# Altium PCB disp.PcbDoc
Units mm, origin at the board's own origin, x right, y up, seen from the top; angles counter-clockwise.
Board outline 82.63 x 32 mm, 2 copper layers (Top Layer, Bottom Layer); 16 components, 16 nets, 79 pads, 3 vias.
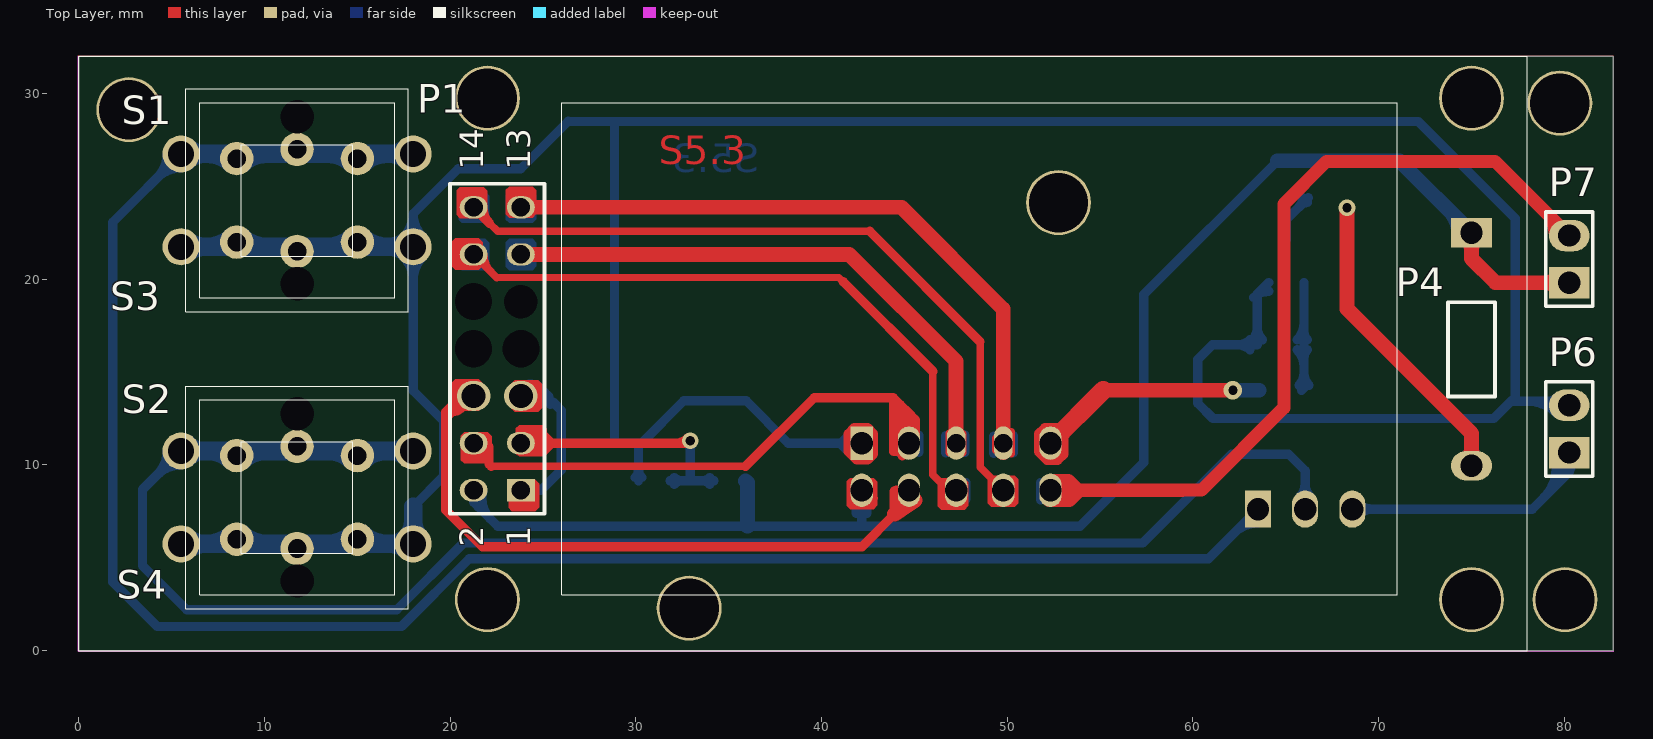
[diagram p0: Top Layer view]
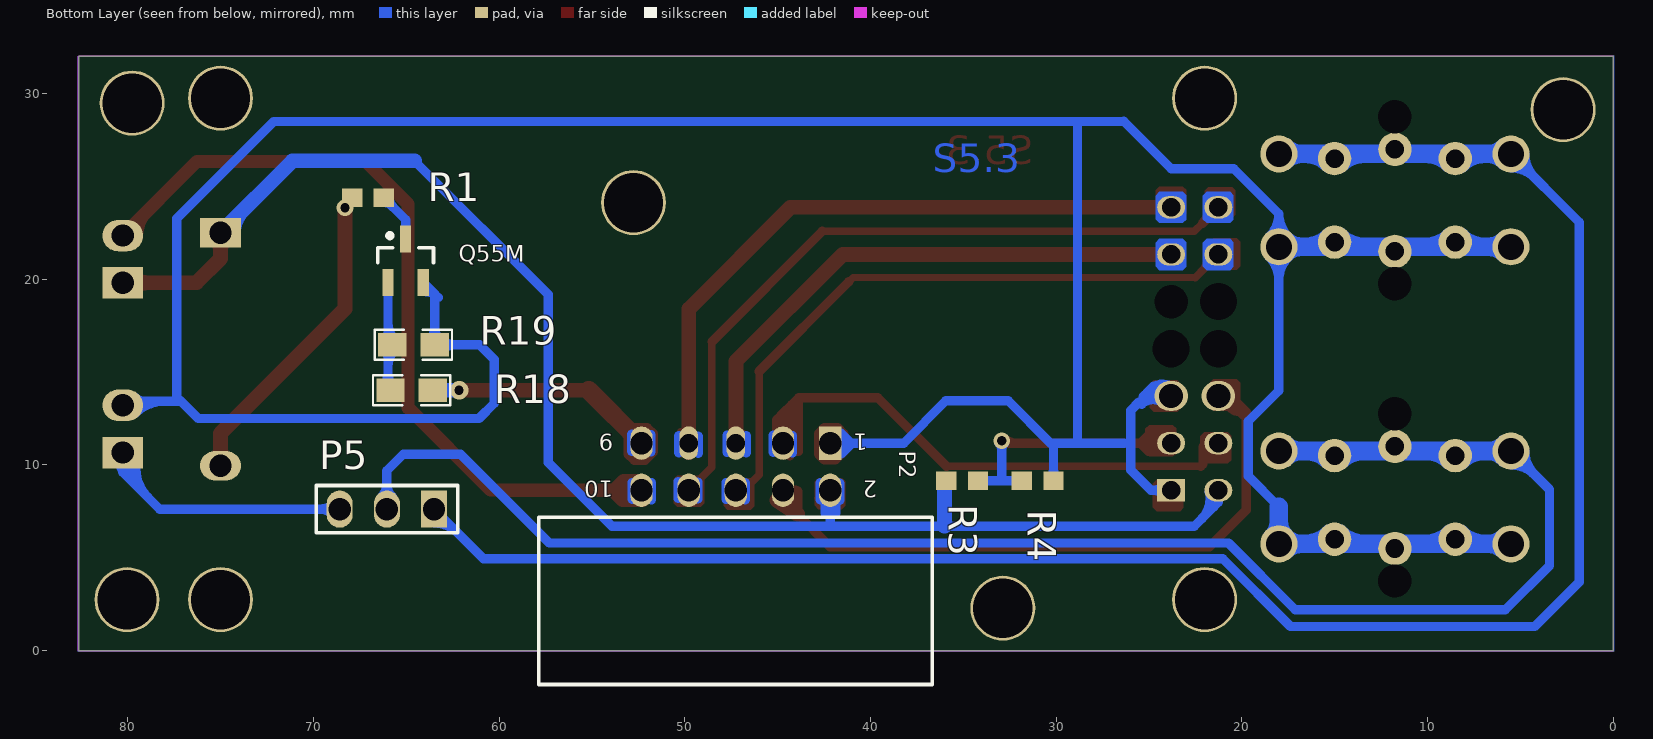
[diagram p1: Bottom Layer view, seen from below]

## Layer stack, top to bottom
Top Layer: signal copper 0.0356
Dielectric: dielectric 0.32, FR-4, Dk 4.8
Bottom Layer: signal copper 0.0356

## Board outline
0,0 82.625,0 82.625,32 0,32

## Design rules (kind name [scope] priority, off if disabled: settings)
Clearance [All] p1: gap=0.2
PolygonConnect [All] p1: connectstyle=Relief reliefconductorwidth=0.254 reliefentries=4 polygonreliefangle="90 Angle"
RoomDefinition Sheet1 [InComponentClass('Sheet1')] p1: confinementstyle=ConfineIn formatcopy=TRUE lockcomponents=FALSE outline -75.6,-85.9 -24.8,-85.9 -24.8,-60.5 -75.6,-60.5
RoutingVias [All] p1: holewidth=1 width=1.27 viastyle="Through Hole" minholewidth=0.8 minwidth=1.27 maxholewidth=2 maxwidth=2
SilkscreenOverComponentPads [All] p1: minsilkscreentomaskgap=0.254
SolderMaskExpansion [All] p1: expansion=0.102
TestPointUsage [All] p1: valid=0 allowmultiple=FALSE
Testpoint [All] p1: side=15 testpointundercomponent=TRUE minsize=1.016 maxsize=2.54 preferedsize=1.524 minholesize=0 maxholesize=1.016 preferedholesize=0.813 testpointgrid=0.025 style=1023 order=0-112345678
Width [All] p1: maxlimit=2 minlimit=0.254 preferedwidth=0.8
23 further rules are at their usual default settings.

## Classes and differential pairs
component class Sheet1: P1 P2 P4 P5 P6 Q55M R1 R3 R4 R18 R19 S1 S2 S3 S4

## Components (designator, comment, footprint, x,y, rotation, side; value= is the part's Value field where it differs from the comment)
P1 "Header 7X2" HDR2X7 23.8,8.636 r90 top locked
P2 "Header 5X2" HDR2X5 42.164,11.176 r0 bottom (schematic designator P4)
P4 "Header 2" HDR1X2#1 75,17.5 r270 top
P5 "Header 3" HDR1X3 63.5,7.62 r0 bottom
P6 "Header 2" HDR1X2#2 80.264,10.668 r90 top
P7 "Header 2" HDR1X2#2 80.264,19.812 r90 top (schematic designator P6)
Q55M "Tr" NPN 65.024,20.828 r180 bottom
R1 "Res Semi" 1608[0603] 67.056,24.384 r0 bottom
R3 "Res Semi" 1608[0603] 35.052,9.144 r180 bottom
R4 "Res Semi" 1608[0603] 30.988,9.144 r180 bottom
R18 "Res" R0805 64.681,14.02 r180 bottom
R19 "Res" R0805 64.586,16.472 r180 bottom
S1 "SW-PB" "omron B3F" 11.75,24.25 r0 top locked
S2 "SW-PB" "omron B3F" 11.75,8.25 r0 top locked
S3 "SW-PB" "button 66" 11.75,24.25 r0 top locked
S4 "SW-PB" "button 66" 11.75,8.25 r0 top locked

## Footprints (in the part's own frame and the unit in brackets; to place one, negate y for a bottom-side part, rotate by r counter-clockwise, add the part's x,y. Pads: shape width x height; smd on the part's side, far side on the other; paste and mask are expansions set on the pad)
1608[0603] [mm] "Chip Capacitor; Body 1.6 x 0.8 mm (LxW typ)"
  rect 1.1x1 smd: 1(-0.85,0) 2(0.85,0)
"button 66" [mm] "Circuit Breaker; 2 Leads"
  round 1.8 hole 1: 1(-3.25,-2.25) 1(0,-2.75) 1(3.25,-2.25) 2(-3.25,2.25) 2(0,2.75) 2(3.25,2.25)
  silkscreen extent -3,-3 3,3
HDR1X2#1 [mm] "Connector; Header; 2 Position"
  rect 1.6x2.2 hole 1.2: 1(-5,0)
  oval 1.6x2.2 hole 1.2: 2(7.54,0)
  silkscreen extent -1.27,-1.27 3.81,1.27
HDR1X2#2 [mm] "Connector; Header; 2 Position"
  rect 1.7x2.2 hole 1.2: 1(0,0)
  oval 1.7x2.2 hole 1.2: 2(2.54,0)
  silkscreen extent -1.27,-1.27 3.81,1.27
HDR1X3 [mm] "Connector; Header; 3 Position"
  rect 1.4x2 hole 1.2: 1(0,0)
  oval 1.4x2 hole 1.2: 2(2.54,0) 3(5.08,0)
  silkscreen extent -1.27,-1.27 6.35,1.27
HDR2X5 [mm] "Connector; Header; 5x2 Position"
  rect 1.2x1.8 hole 1.2: 1(0,0)
  oval 1.2x1.8 hole 1.2: 2(0,2.54) 3(2.54,0) 4(2.54,2.54) 6(5.08,2.54) 8(7.62,2.54) 9(10.16,0) 10(10.16,2.54)
  oval 1x1.8 hole 1: 5(5.08,0) 7(7.62,0)
  silkscreen extent -5.5,4 15.7,13
HDR2X7 [mm] "Connector; Header; 7x2 Position"
  rect 1.2x1.5 hole 1: 1(0,0)
  oval 1.2x1.5 hole 1: 2(0,2.54) 3(2.54,0) 4(2.54,2.54) 11(12.7,0) 12(12.7,2.54) 13(15.24,0) 14(15.24,2.54)
  oval 1.6x1.8 hole 1.3: 5(5.08,0) 6(5.08,2.54)
  round 1 hole 2: 7(7.62,0) 8(7.62,2.54) 10(10.16,2.54)
  round 1 hole 1.8: 9(10.16,0)
  silkscreen extent -1.27,-1.27 16.51,3.81
NPN [mm]
  rect 0.6x1.45 smd: 1(-0.956,-1.004) 2(0.944,-1.004) 3(-0.006,1.346)
  silkscreen extent -1.51,0.07 1.49,1.65, body extent -1.51,-0.53 1.49,0.87, height 1.1
"omron B3F" [mm]
  round 2 hole 1.4: 1(-6.25,-2.5) 1(6.25,-2.5) 2(-6.25,2.5) 2(6.25,2.5)
  round 0 hole 1.8: 5(0,-4.5) 6(0,4.5)
  silkscreen extent -6,-6 6,6
R0805 [mil]
  rect 60x50 smd: 1(44,0) 2(-46,0)
  silkscreen extent -83,-32 81,32, body extent -60,-26 58,26, height 26

## Part data
P1: "Header, 7-Pin, Dual row"
P2: "Header, 5-Pin, Dual row"
P4 P6 P7: "Header, 2-Pin"
P5: "Header, 3-Pin"
Q55M: library part 2N2222, "General Purpose Transistor NPN Silicon"
R1 R3 R4: "Semiconductor Resistor"
R18 R19: library part Res1, "Resistor"
S1 S2 S3 S4: "Switch"

## Free pads (board coordinates)
  round 3.5 hole 3.2: 12(22,2.75) 13(75,2.75) 14(75,29.75) 15(2.692,29.134) 15(22,29.75) 15(32.868,2.286) 15(52.756,24.13) 15(79.756,29.489) 15(80.035,2.743)

## Via types
v1: diameter 0.9, hole 0.5, Top Layer to Bottom Layer, 2 vias
v2: diameter 1, hole 0.5, Top Layer to Bottom Layer, 1 vias

## Nets (pads, with @x,y where several pads share a name; then routed paths per layer and width w, separated by ;. In a path a pad name is that pad's centre, name@x,y a point inside that pad or via, vN(x,y) a via of type N, cw(c..) or ccw(c..) an arc to the next point about the centre after c; other vN are vias at no path point)
+5V: P1.2 P2.2 P4.1 P7.1 R3.1 | length 98.1
  Top Layer w0.5: 41.605,8.077 P2.2@41.605,9.042 ; P2.2@41.91,7.883 42.443,7.883 42.774,8.213
  Top Layer w0.8: P4.1@74.717,22.217 cw(c74.034,21.534) 75,21.534 cw(c75.966,21.534) P4.1@75.283,22.217 ; P4.1 75,21.114 76.302,19.812 P7.1 ; P7.1@79.696,19.494 ccw(c78.928,18.726) 78.928,19.812 ccw(c78.928,20.898) P7.1@79.696,20.13
  Bottom Layer w0.5: P1.2 21.26,7.99 22.55,6.7 36,6.7 53.919,6.7 57.35,10.131 57.35,19.175 64.56,26.385 ; P1.2@21.264,8.672 ccw(c22.235,8.43) 21.528,7.722 ; P1.2@21.75,8.551 ccw(c23.234,8.18) 22.152,7.098 ; P2.2@41.656,8.094 P2.2@41.656,9.009 ; 41.859,7.392 cw(c42.518,7.392) P2.2@42.287,8.008 ; 41.859,7.442 41.859,8.331 P2.2 ; P2.2@41.917,8.089 cw(c41.319,7.491) 42.164,7.491 cw(c43.009,7.491) P2.2@42.411,8.089 ; P2.2@42.032,8.012 cw(c41.782,7.4) 42.443,7.4 ; 42.164,6.736 P2.2 ; P2.2@42.225,8.636 P2.2 ; 42.443,7.442 42.443,8.357 P2.2 ; P2.2@42.697,8.12 P2.2@42.697,9.034
  Bottom Layer w0.8: R3.1 36,9.046 36,6.7 ; 64.56,26.385 71.115,26.385 P4.1 ; 73.805,23.695 cw(c72.61,22.5) P4.1@74.3,22.5
CONTRAST: P1.3 R3.2 R4.1 | length 22.9
  Top Layer w0.5: P1.3@23.749,10.744 25.019,10.744 ; P1.3 25.451,11.176 ; P1.3@23.801,11.19 cw(c24.37,11.138) 24.37,11.709 ; P1.3@24.284,11.282 ccw(c25.019,11.516) 25.019,10.744 ; P1.3@24.299,11.144 cw(c24.917,11.088) 24.917,11.709 ; 24.511,11.709 24.917,11.709 ; 24.917,11.481 24.917,11.709 ; 32.143,11.176 ccw(c32.143,12.082) v1@32.784,11.441 ; v1@32.925,11.176 25.451,11.176 ; 24.917,11.709 25.451,11.176 ; 25.019,10.744 25.451,11.176
  Bottom Layer w0.5: R4.1 R3.2 ; R4.1@32.065,8.967 cw(c32.492,8.54) 32.492,9.144 cw(c32.492,9.748) R4.1@32.065,9.321 ; v1@32.784,11.159 cw(c32.442,10.817) 32.925,10.817 cw(c33.408,10.817) v1@33.066,11.159 ; 32.925,9.271 v1(32.925,11.3) ; R3.2@33.975,8.967 ccw(c33.548,8.54) 33.548,9.144 ccw(c33.548,9.748) R3.2@33.975,9.321
GND: P1.1 P1.5 P2.1 P6.2 Q55M.2 R4.2 R19.1 S1.1 S2.1 S3.1 S4.1 | length 247.9
  Top Layer w0.5: 41.427,10.719 41.885,10.262 ; 41.427,10.719 41.427,11.684 ; 41.427,10.719 41.885,10.262 ; 41.427,10.719 41.427,11.684 ; 41.427,11.684 P2.1@41.758,12.014 ; 41.427,11.684 P2.1@41.758,12.014 ; P2.1@41.758,12.014 42.291,12.014 42.799,11.506 42.799,10.592 ; P2.1@41.758,12.014 42.469,12.014 42.799,11.684 42.799,10.592 ; 41.885,10.262 42.469,10.262 ; 41.885,10.262 42.469,10.262 ; 42.469,10.262 42.799,10.592 ; 42.469,10.262 42.799,10.592
  Bottom Layer w0.5: S1.1@17.47,21.22 cw(c16.189,19.939) 18,19.939 cw(c19.811,19.939) S1.1@18.53,21.22 ; S1.1@17.477,22.288 ccw(c16.275,23.525) 18,23.525 ; 18,7.75 19.65,9.4 19.65,12.35 18,14 18,21.75 18,23.525 ; S1.1@18.523,22.288 cw(c19.725,23.525) 18,23.525 ; P1.5@23.663,14.15 cw(c24.245,13.4) 24.917,14.072 ; P1.1 24.886,8.636 25.975,9.725 25.975,12.938 25.527,13.386 25.273,13.386 24.917,13.741 ; P1.5@23.969,13.755 cw(c24.596,12.949) 25.318,13.671 ; P1.5@23.97,13.756 cw(c24.43,13.133) 24.978,13.681 ; P1.5@23.984,13.763 cw(c24.354,12.665) 25.174,13.485 ; P1.1@24.197,8.389 cw(c24.795,7.791) 24.795,8.636 cw(c24.795,9.481) P1.1@24.197,8.883 ; P1.5@24.267,13.354 cw(c24.779,12.661) 25.388,13.27 ; 24.74,14.249 25.082,13.907 ; 26.34,11.176 30.296,11.176 32.57,13.45 35.934,13.45 38.208,11.176 41.046,11.176 ; 26.356,28.506 23.8,25.95 20.425,25.95 18,23.525 ; 26.362,28.5 28.85,28.5 ; 28.85,11.486 28.85,28.5 ; R4.2@29.961,9.321 ccw(c29.534,9.748) 30.138,9.748 ccw(c30.742,9.748) R4.2@30.315,9.321 ; R4.2 30.138,11.113 ; 41.554,11.684 41.656,11.684 P2.1 41.58,10.592 41.046,11.125 41.046,11.176 ; P2.1@41.58,11.709 41.046,11.176 ; P2.1@41.917,10.929 ccw(c41.319,10.331) 41.319,11.176 ccw(c41.319,12.021) P2.1@41.917,11.423 ; R19.1@63.069,16.2 ccw(c62.412,15.543) 62.412,16.472 ccw(c62.412,17.402) R19.1@63.069,16.744 ; R19.1@63.196,16.744 ccw(c62.539,17.402) 63.468,17.402 ccw(c64.398,17.402) R19.1@63.741,16.744 ; 63.269,19.013 cw(c64.08,18.202) Q55M.2@64.08,19.349 ; Q55M.2 63.468,19.212 R19.1 61.047,16.472 60.25,15.675 60.25,13.325 61.075,12.5 76.2,12.5 77.125,13.426 ; 78.04,13.426 cw(c78.04,11.234) P6.2@79.59,12.784 ; 79.091,13.426 ccw(c79.091,14.131) P6.2@79.59,13.632 ; P6.2 80.047,13.426 77.125,13.426 ; 28.85,28.5 72.125,28.5 77.35,23.275 77.35,13.65 77.125,13.426
  Bottom Layer w1: S2.1@5.5,5.75 18,5.75 18,7.75 ; S1.1@5.5,21.75 S1.1@18,21.75 ; S2.1@5.854,5.396 cw(c6.707,4.543) 6.707,5.75 cw(c6.707,6.957) S2.1@5.854,6.104 ; S1.1@5.854,21.396 cw(c6.707,20.543) 6.707,21.75 cw(c6.707,22.957) S1.1@5.854,22.104 ; 6.931,5.75 ccw(c6.931,7.569) S4.1@8.217,6.283 ; 6.931,21.75 ccw(c6.931,23.569) S3.1@8.217,22.283 ; S4.1@8.783,6.283 ccw(c10.069,7.569) 10.069,5.75 ; S3.1@8.783,22.283 ccw(c10.069,23.569) 10.069,21.75 ; 13.431,5.75 ccw(c13.431,7.569) S4.1@14.717,6.283 ; 13.431,21.75 ccw(c13.431,23.569) S3.1@14.717,22.283 ; S4.1@15.283,6.283 ccw(c16.569,7.569) 16.569,5.75 ; S3.1@15.283,22.283 ccw(c16.569,23.569) 16.569,21.75 ; S2.1@17.646,5.396 ccw(c16.793,4.543) 16.793,5.75 ccw(c16.793,6.957) 17.646,6.104 ccw(c16.793,6.957) 18,6.957 ccw(c19.207,6.957) S2.1@18.354,6.104 ; S1.1@17.646,21.396 ccw(c16.793,20.543) 16.793,21.75 ccw(c16.793,22.957) S1.1@17.646,22.104
LCD_BL: P4.2 R1.2 | length 18.2
  Top Layer w0.8: v1(68.3,23.85) 68.3,18.4 75,11.7 P4.2 ; P4.2@74.717,10.243 ccw(c74.034,10.926) 75,10.926 ccw(c75.966,10.926) P4.2@75.283,10.243
LCD_D1: P1.11 P2.5 | length 34.1
  Top Layer w0.4: P2.5@46.863,10.668 P2.5@46.863,11.709 ; P2.5@47.6,10.668 P2.5@47.6,11.684
  Top Layer w0.8: P1.11 41.489,21.336 47.244,15.581 P2.5
  Bottom Layer w0.5: 46.685,10.66 46.685,11.574 ; P2.5@47.727,10.685 P2.5@47.727,11.6
LCD_D2: P1.12 P2.6 | length 37.1
  Top Layer w0.4: P1.12 22.51,20.086 ; P1.12@21.41,20.936 cw(c21.41,20.332) 21.837,20.759 ; P1.12@21.81,21.336 ccw(c23.138,21.336) 22.199,20.397 ; 22.51,20.096 40.929,20.096 41.162,19.863 ; 45.994,15.031 45.994,9.48 46.584,8.89
  Top Layer w0.5: 41.162,19.863 45.994,15.031
  Bottom Layer w0.5: P2.6@46.736,8.12 P2.6@46.736,9.034 ; P2.6@47.777,8.145 P2.6@47.777,9.06
LCD_D3: P1.13 P2.7 | length 39.6
  Top Layer w0.4: P2.7@49.378,10.795 P2.7@49.378,11.43 ; P2.7@50.216,10.592 P2.7@50.216,11.786
  Top Layer w0.8: P1.13 44.299,23.876 49.784,18.391 P2.7@49.784,10.668
  Bottom Layer w0.5: 49.276,10.634 49.276,11.549 ; 50.317,10.66 50.317,11.574
LCD_D4: P1.14 P2.8 | length 42
  Top Layer w0.4: 22.114,23.022 22.55,22.586 42.589,22.586 ; 48.534,16.641 48.534,9.886 P2.8
  Top Layer w0.5: P1.14 22.114,23.022 cw(c22.967,23.876) P1.14@21.76,23.876 ; 42.589,22.586 48.534,16.641
  Bottom Layer w0.254: P2.8@49.784,8.128 P2.8@49.784,8.164
  Bottom Layer w0.5: P2.8@49.301,8.171 P2.8@49.301,9.085 ; P2.8@49.784,8.164 P2.8@49.784,8.527 ; P2.8@50.343,8.196 P2.8@50.343,9.11
LCD_E: P1.6 P2.4 | length 42.7
  Top Layer w0.5: 19.881,12.662 ccw(c18.878,13.868) P1.6@20.447,13.868 ; 20.147,12.879 ccw(c20.147,13.482) 20.574,13.056 ; P1.6 20.625,13.716 19.76,12.851 19.76,7.57 21.73,5.6 42.176,5.6 43.917,7.341 ; 43.93,7.354 44.208,7.542 P2.4@45.034,8.103 ; 43.959,7.383 ccw(c43.007,8.336) P2.4@44.354,8.336 ; 44.039,8.636 ccw(c44.039,8.463) 43.917,8.585 43.917,7.341 ; 44.143,7.498 ccw(c43.798,8.006) P2.4@44.375,8.216 ; P2.4@44.704,8.128 43.917,7.341
  Top Layer w0.8: 43.93,7.354 44.28,7.591 P2.4@45.034,8.103 ; 44.143,7.498 ccw(c43.669,8.197) P2.4@44.506,8.309
LCD_RS: P1.4 P2.3 | length 42.2
  Top Layer w0.4: 22.205,9.926 35.901,9.926
  Top Layer w0.5: P1.4@21.396,10.826 cw(c21.368,10.11) 22.085,10.11 ; 22.085,10.985 22.085,10.046 22.205,9.926 ; 35.901,9.926 39.6,13.625 43.85,13.625 44.235,13.24 ; 43.891,11.887 43.891,10.719 44.247,10.719 P2.3 ; 43.891,13.31 43.891,11.76 P2.3@44.475,11.176 ; P2.3@44.171,11.176 P2.3@44.475,11.176 ; P2.3@44.221,11.659 44.221,13.209 cw(c44.266,13.209) 44.235,13.24 ; 44.221,12.344 ccw(c44.741,12.344) P2.3@44.719,11.826 ; P2.3@44.348,10.49 44.704,10.668 P2.3 ; P2.3@44.457,11.723 ccw(c43.859,12.321) 44.704,12.321 ccw(c45.549,12.321) P2.3@44.951,11.723 ; P2.3@44.632,11.819 ccw(c44.522,12.344) 45.06,12.344 ; P2.3@44.704,11.572 44.704,12.771 ; 45.041,12.389 cw(c44.997,12.344) 45.06,12.344 ; 44.235,13.24 44.704,12.771 ; P2.3@44.475,11.176 P2.3 ; P2.3 45.06,11.532 45.06,12.344 ; 44.704,12.771 45.009,12.466 ; 45.01,12.465 cw(c44.888,12.344) 45.06,12.344 ; 45.01,12.465 cw(c44.888,12.344) 45.06,12.344 ; 45.01,12.465 cw(c44.888,12.344) 45.06,12.344
  Bottom Layer w0.5: P2.3@44.196,10.66 P2.3@44.196,11.574 ; P2.3@45.237,10.685 P2.3@45.237,11.6
NetP2_9: P2.9 R18.1 | length 25.7
  Top Layer w0.5: 51.679,10.709 51.679,11.674 ; 51.679,10.709 52.136,10.251 ; 51.679,10.709 51.679,11.674 ; 51.679,10.709 52.136,10.251 ; 51.679,11.674 52.009,12.004 ; 51.679,11.674 52.009,12.004 ; 52.009,12.004 52.72,12.004 53.05,11.674 53.05,10.582 ; 52.009,12.004 52.542,12.004 53.05,11.496 53.05,10.582 ; 52.136,10.251 52.72,10.251 ; 52.136,10.251 52.72,10.251 ; 52.72,10.251 53.05,10.582 ; 52.72,10.251 53.05,10.582
  Top Layer w0.8: 55.173,14.025 v2(62.15,14.025)
  Top Layer w1: P2.9 55.173,14.025 ; P2.9@52.324,11.576 ccw(c52.324,12.542) 53.007,11.859
  Bottom Layer w0.5: P2.9@51.816,10.711 P2.9@51.816,11.625 ; P2.9@52.857,10.736 P2.9@52.857,11.65
  Bottom Layer w0.8: v2(62.15,14.025) R18.1@63.558,14.025
NetP5_1: P5.1 S1.2 S3.2 | length 116.1
  Bottom Layer w0.5: S1.2@4.75,26.75 cw(c2.939,26.75) 4.22,25.47 cw(c5.5,24.189) S1.2@5.5,26 ; S1.2@5.5,26.75 1.825,23.075 1.825,3.7 4.225,1.3 17.378,1.3 21.028,4.95 60.83,4.95 P5.1 ; 62.22,6.34 cw(c63.5,5.059) P5.1@63.5,6.87
  Bottom Layer w1: S1.2@5.5,26.75 11.75,26.75 S1.2@18,26.75 ; S1.2@5.854,26.396 cw(c6.707,25.543) 6.707,26.75 cw(c6.707,27.957) S1.2@5.854,27.104 ; 6.931,26.75 cw(c6.931,24.931) S3.2@8.217,26.217 ; S3.2@8.783,26.217 cw(c10.069,24.931) 10.069,26.75 ; 13.431,26.75 cw(c13.431,24.931) S3.2@14.717,26.217 ; S3.2@15.283,26.217 cw(c16.569,24.931) 16.569,26.75 ; S1.2@17.646,26.396 ccw(c16.793,25.543) 16.793,26.75 ccw(c16.793,27.957) S1.2@17.646,27.104
NetP5_2: P5.2 S2.2 S4.2 | length 103.1
  Bottom Layer w0.5: S2.2@4.75,10.75 cw(c2.939,10.75) 4.22,9.47 cw(c5.5,8.189) S2.2@5.5,10 ; S2.2@5.5,10.75 3.425,8.675 3.425,4.575 5.8,2.2 17.11,2.2 20.71,5.8 57.3,5.8 62.075,10.575 65.15,10.575 66.04,9.685 P5.2 ; P5.2@65.722,8.238 ccw(c64.954,9.006) 66.04,9.006 ccw(c67.126,9.006) P5.2@66.358,8.238
  Bottom Layer w1: S2.2@5.5,10.75 11.75,10.75 S2.2@18,10.75 ; S2.2@5.854,10.396 cw(c6.707,9.543) 6.707,10.75 cw(c6.707,11.957) S2.2@5.854,11.104 ; 6.931,10.75 cw(c6.931,8.931) S4.2@8.217,10.217 ; S4.2@8.783,10.217 cw(c10.069,8.931) 10.069,10.75 ; 13.431,10.75 cw(c13.431,8.931) S4.2@14.717,10.217 ; S4.2@15.283,10.217 cw(c16.569,8.931) 16.569,10.75 ; S2.2@17.646,10.396 ccw(c16.793,9.543) 16.793,10.75 ccw(c16.793,11.957) S2.2@17.646,11.104
NetP5_3: P5.3 P6.1 | length 22.4
  Bottom Layer w0.5: P5.3 78.27,7.62 80.264,9.614 ; P5.3@68.898,7.302 cw(c69.666,6.534) 69.666,7.62 cw(c69.666,8.706) P5.3@68.898,7.938 ; 78.922,8.272 ccw(c77.395,9.799) P6.1@79.445,10.479 ; 79.495,8.845 ccw(c78.256,10.084) P6.1@79.919,10.637 ; P6.1@79.958,10.152 cw(c79.638,9.614) 80.264,9.614 ; 80.068,9.418 ccw(c79.116,10.37) P6.1@80.394,10.794 ; P6.1 80.264,9.614 ; P6.1@80.57,10.152 ccw(c80.89,9.614) 80.264,9.614
NetQ55M_1: Q55M.1 R18.2 R19.2 | length 10.2
  Bottom Layer w0.5: R19.2@65.609,16.2 cw(c64.714,15.305) 65.98,15.305 ; R19.2@65.609,16.744 ccw(c64.714,17.639) 65.98,17.639 ; R18.2@65.704,14.292 ccw(c65.039,14.958) 65.98,14.958 ; R18.2 65.98,14.15 Q55M.1 ; 65.98,14.941 ccw(c66.898,14.941) R18.2@66.249,14.292 ; 65.98,15.78 cw(c66.573,15.78) R19.2@66.154,16.2 ; 65.98,17.164 ccw(c66.573,17.164) R19.2@66.154,16.744
NetQ55M_3: Q55M.3 R1.1 | length 3.6
  Bottom Layer w0.5: Q55M.3 65.03,23.208 R1.1 ; 65.694,23.872 ccw(c65.182,24.384) R1.1@65.906,24.384 ; R1.1@65.815,23.993 cw(c66.156,23.651) R1.1@66.156,24.134
pads on no net: P1.7 P1.8 P1.9 P1.10 P2.10 P7.2 S1.5 S1.6 S2.5 S2.6
copper on no net: | length 56.2
  Top Layer w0.7: 52.248,8.077 53.34,8.077 53.899,8.636 ; 52.324,8.636 59.436,8.636 ; 52.375,9.169 53.289,9.169 53.823,8.636 ; 53.343,8.639 60.455,8.639 64.89,13.074 64.89,24.047 67.183,26.34 76.276,26.34 80.264,22.352 ; 78.984,23.632 cw(c77.703,22.352) 79.514,22.352
  Bottom Layer w0.5: 51.791,8.12 51.791,9.034 ; 52.832,8.145 52.832,9.06

## Polygon pours and split planes (outlines as drawn)
no net on Top Layer "Bottom Layer-No Net" (solid, shelved, pour order 1000): -0.025,-0.025 82.65,-0.025 82.65,32 0,32 -0.025,32.025
no net on Bottom Layer "Bottom Layer-No Net" (solid, shelved, pour order 1001): -0.025,-0.025 82.65,-0.025 82.65,32 0,32 -0.025,32.025

## Keep-outs
Keep-Out Layer:
  lines w0.01: -0.025,-0.025 -0.025,32 82.65,32 82.65,-0.025 -0.025,-0.025

## Other copper
Top Layer:
  region net GND: 23.139,9.017 23.317,9.195 24.587,9.195 24.79,8.992 24.79,7.722 24.587,7.518 23.317,7.518 23.139,7.696
  region net LCD_E: 20.091,14.427 20.269,14.605 21.539,14.605 21.742,14.402 21.742,13.132 21.539,12.929 20.269,12.929 20.091,13.106
  region net GND: 23.292,14.376 23.469,14.554 24.739,14.554 24.943,14.351 24.943,13.081 24.739,12.878 23.469,12.878 23.292,13.056
  region net +5V: 41.351,9.119 41.529,9.296 42.799,9.296 43.002,9.093 43.002,7.823 42.799,7.62 41.529,7.62 41.351,7.798
  region net CONTRAST: 23.531,11.963 23.709,12.141 24.979,12.141 25.182,11.938 25.182,10.668 24.979,10.465 23.709,10.465 23.531,10.643
  region net LCD_RS: 20.577,11.58 20.755,11.758 22.025,11.758 22.228,11.554 22.228,10.284 22.025,10.081 20.755,10.081 20.577,10.259
  region net LCD_D2: 20.091,22.022 20.269,22.2 21.539,22.2 21.742,21.996 21.742,20.726 21.539,20.523 20.269,20.523 20.091,20.701
  region net LCD_D4: 20.345,24.79 20.523,24.968 21.793,24.968 21.996,24.765 21.996,23.495 21.793,23.292 20.523,23.292 20.345,23.47
  region net LCD_D3: 22.987,24.816 23.165,24.994 24.435,24.994 24.638,24.79 24.638,23.52 24.435,23.317 23.165,23.317 22.987,23.495
  region net LCD_D2: 46.253,9.093 46.431,9.271 47.701,9.271 47.904,9.068 47.904,7.798 47.701,7.595 46.431,7.595 46.253,7.772
  region net LCD_D4: 48.946,9.246 49.123,9.423 50.393,9.423 50.597,9.22 50.597,7.95 50.393,7.747 49.123,7.747 48.946,7.925
  text "S5.3" at 31.217,26.187 h1.52
Bottom Layer:
  region net LCD_D1: 22.987,21.996 23.165,22.174 24.435,22.174 24.638,21.971 24.638,20.701 24.435,20.498 23.165,20.498 22.987,20.676
  region net LCD_D2: 20.447,21.996 20.625,22.174 21.895,22.174 22.098,21.971 22.098,20.701 21.895,20.498 20.625,20.498 20.447,20.676
  region net LCD_D4: 20.447,24.536 20.625,24.714 21.895,24.714 22.098,24.511 22.098,23.241 21.895,23.038 20.625,23.038 20.447,23.216
  region: 22.987,24.536 23.165,24.714 24.435,24.714 24.638,24.511 24.638,23.241 24.435,23.038 23.165,23.038 22.987,23.216
  text "S5.3" at 36.652,25.756 h1.52

## Silkscreen, mask and mechanical layers (free items; w line width, h text height)
Top Overlay:
  lines w0.05: 0,0 78,0 78,32 0,32 0,0 ; 6.5,3 6.5,13.5 17,13.5 17,3 6.5,3 ; 6.5,19 17,19 17,29.5 6.5,29.5 6.5,19 ; 26,3 26,29.5 71,29.5 71,3 26,3

## Text inside footprints (layer, text, board x,y; h text height)
P1: Top Overlay "2" at 21.768,5.588 h1.27 r90; Top Overlay "1" at 24.308,5.588 h1.27 r90; Top Overlay "14" at 21.768,25.908 h1.27 r90; Top Overlay "13" at 24.308,25.908 h1.27 r90
P2: Bottom Overlay "2" at 39.624,9.144 h0.89 r180; Bottom Overlay "1" at 40.132,11.684 h0.89 r180; Bottom Overlay "9" at 53.848,11.684 h0.89 r180; Bottom Overlay "10" at 53.848,9.144 h0.89 r180